# Altium PCB HU_revB.PcbDoc (part 2 of 3)
Units mm, origin at the board's own origin, x right, y up, seen from the top; angles counter-clockwise.
Board outline 180 x 140 mm, 4 copper layers (Top Layer, Mid Layer 1, Mid Layer 2, Bottom Layer), stack 1.586 mm thick; 314 components, 348 nets, 1361 pads, 16 vias.
Unrouted connection lines stored in the file: 902.
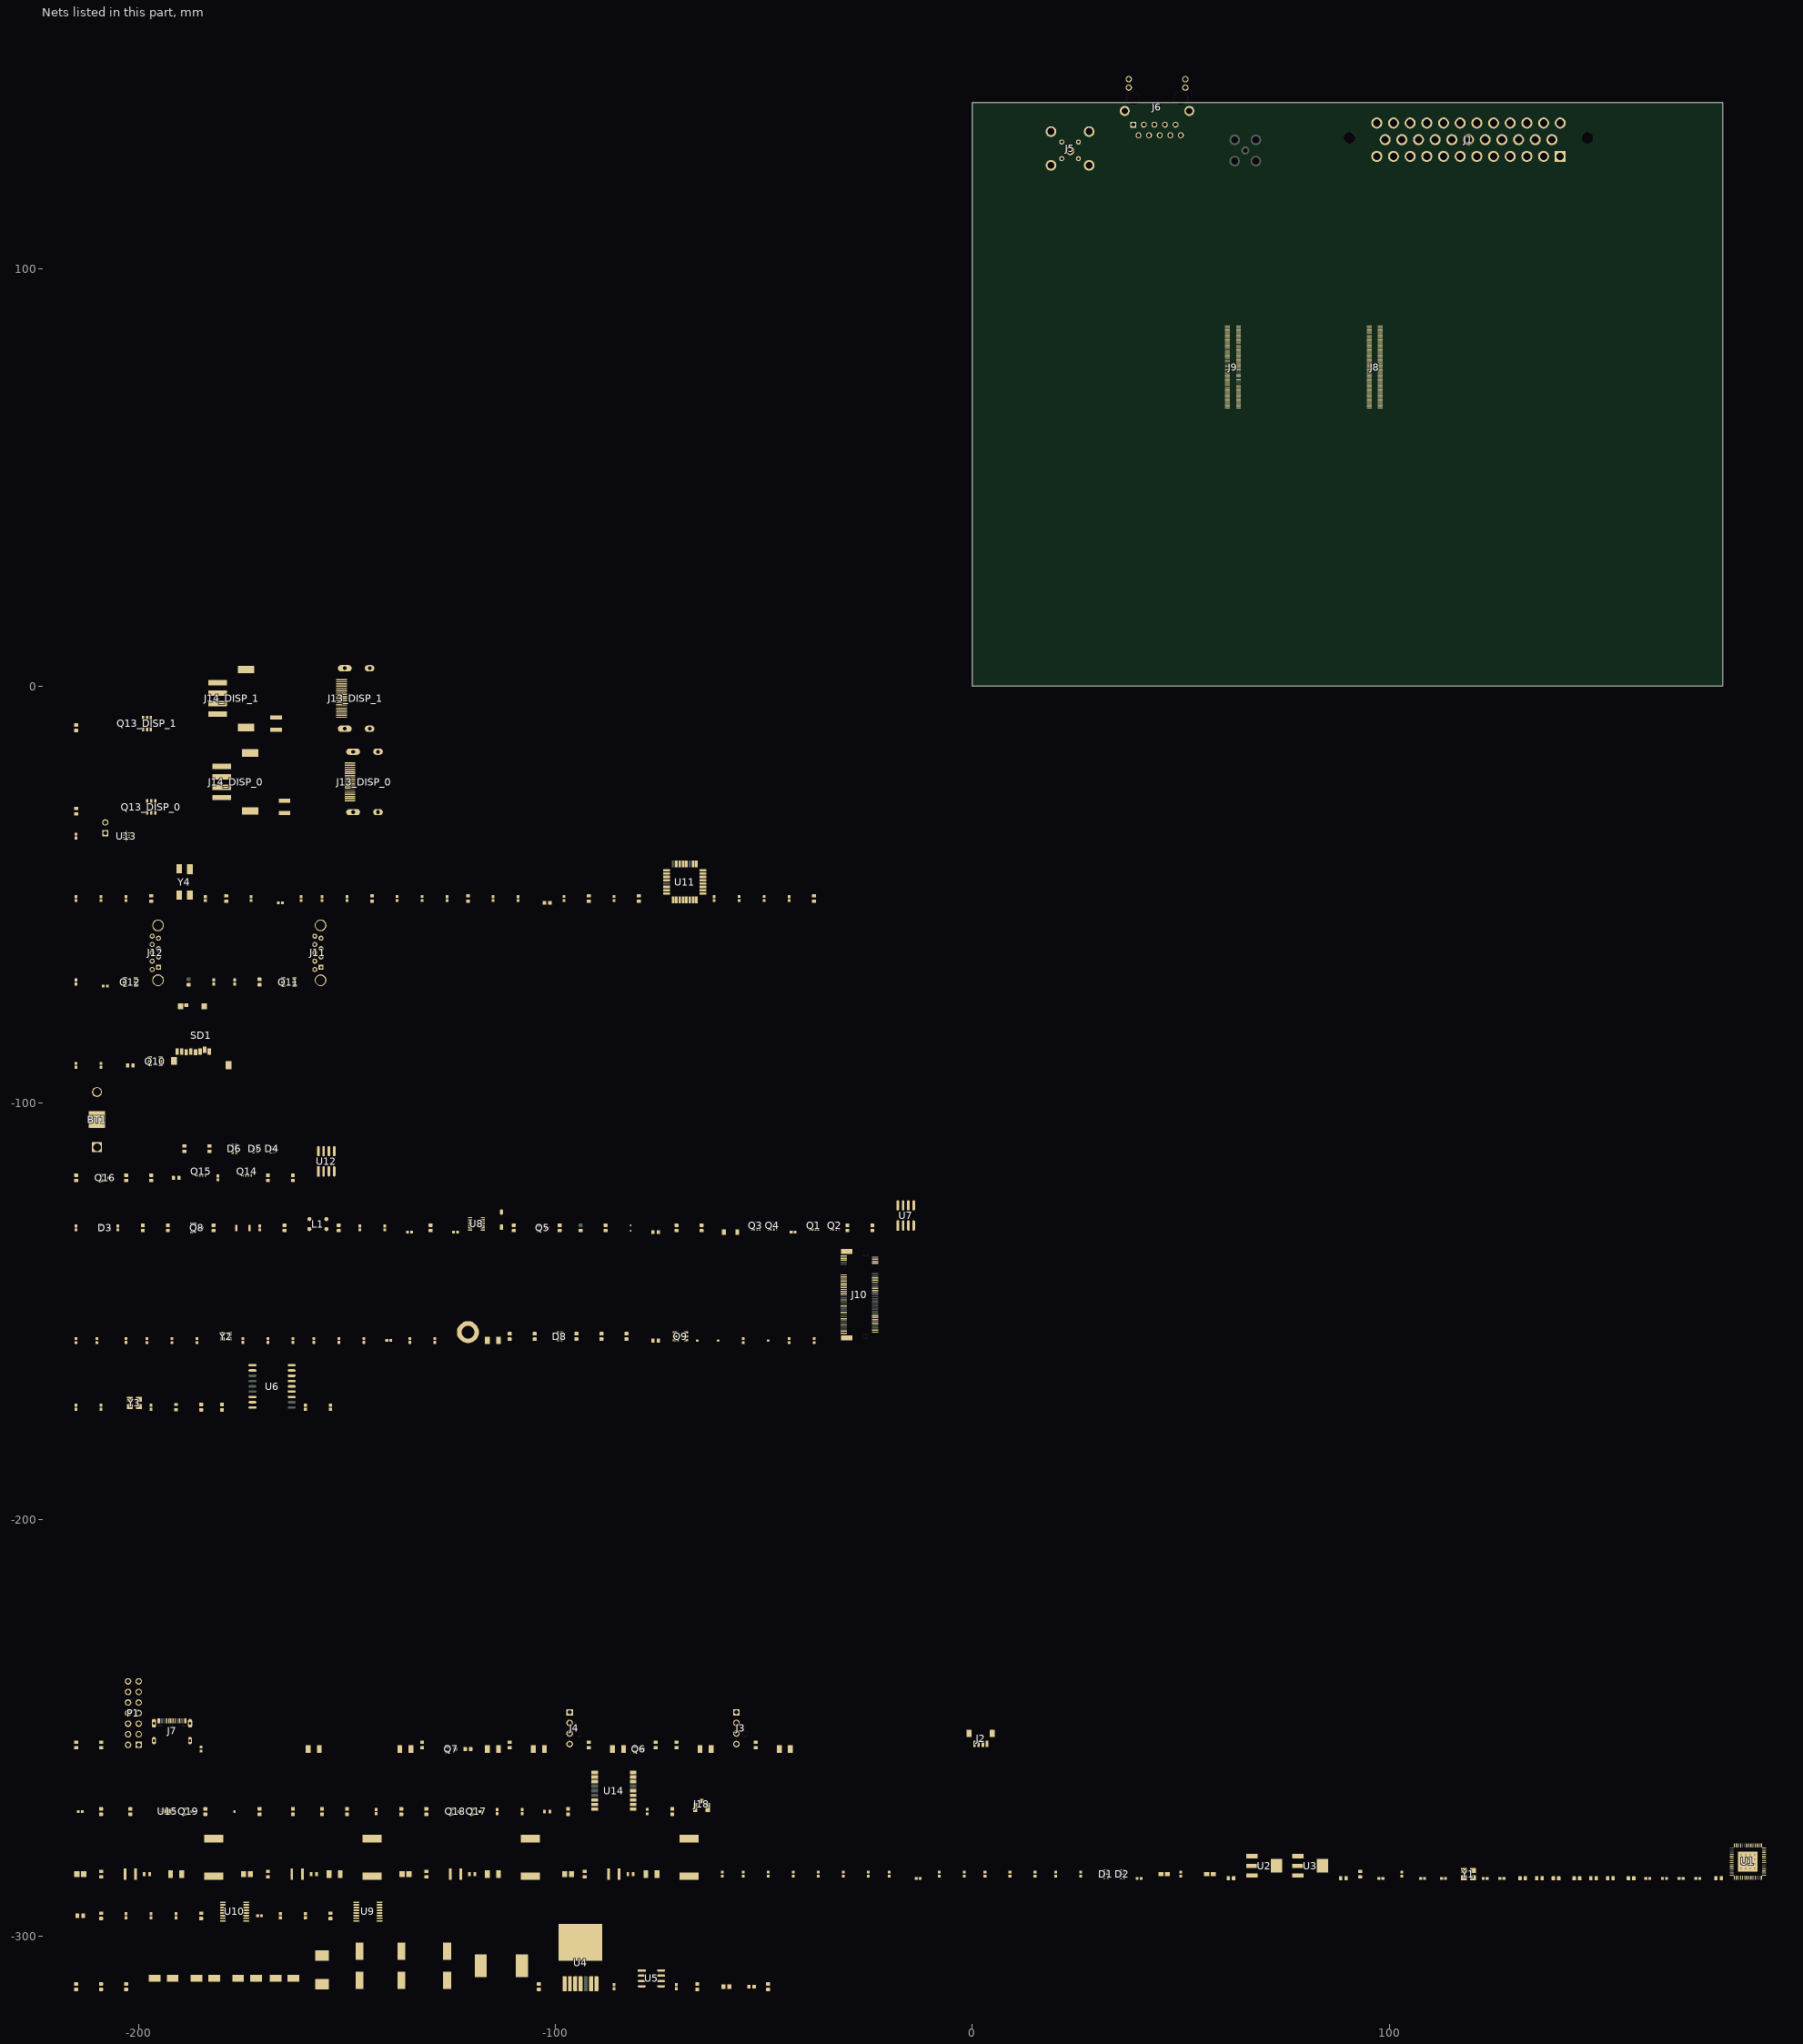
[diagram p2: the nets of this part, all layers, seen from the top]

## Part data
BT1: library part CMP-2000-05463-1, "Holder Battery Coin, 12 mm, 2-Pin THD, RoHS", Manufacturer=Keystone, Package Description="2-Pin Through Hole Device, Body 13.21 x 12.07 mm", Datasheet URL=https://datasheet.ciiva.com/3/3001-3954.pdf, Datasheet Version="Rev. H, 09/2006", Manufacturer URL=http://www.keyelco.com/, Mounting Technology=ThroughHole, Package Reference=3001
C1 C2 C3 C4 C5 C6 C7 C8 C8 C9 C9 C10 C10 C11 C11 C12 C13 C13 C14 C15 C16 C17 C17 C18 C19 C20 C21 C22 C23 C24 C25 C26 C27 C28 C29 C30 C35 C36 C37 C45 C46 C47 C48 C49 C50 C51 C52 C53 C54 C55 C56 C57 C58 C59 C60 C61 C62 C63 C64 C65 C66 C67 C68 C69 C70 C71 C72 C73 C74 C75 C76 C77 C78 C79 C80 C81 C82 C83 C84 C85 C86 C87 C88 C89 C90 C91: library part CMP-001-00058-1, "LARGE PADS, 0402 CAP, CHANGE COMMENT TO MATCH REAL P/N", Capacitor Type=Ceramic, Case/Package=0402, Max Operating Temperature=85°C, Min Operating Temperature=-55°C, Mounting Technology="Surface Mount", Pins=2, RoHS Compliant=Yes
C12 C14: library part CMP-2006-02792-2, "Chip Multilayer Ceramic Capacitors for General Purpose, 0603, 10uF, X5R, 15%, 20%, 6.3V", Capacitance=10uF, Case Code (Imperial)=0603, Case Code (Metric)=1608, Dielectric=X5R, Max Operating Temperature=85°C, Min Operating Temperature=-55°C, Package Quantity=4000, Tolerance=20%, Voltage=6.3V, Case/Package=0603, Depth=0.8mm, Height=0.8mm, Lead Free="Lead Free", Length=1.6mm, Material=Ceramic, Mount="Surface Mount", Packaging="Tape and Reel", Radiation Hardening=No, REACH SVHC="No SVHC", Termination=SMD/SMT, Thickness=0.035inch, Voltage Rating=6.3V, Voltage Rating (DC)=6.3V, Width=0.031inch
C31 C32 C33 C34: library part CMP-2007-03222-3, "Chip Multilayer Ceramic Capacitors for General Purpose, 0805, 22uF, X5R, 15%, 20%, 25V", Capacitance=22uF, Case Code (Imperial)=0805, Case Code (Metric)=2012, Dielectric=X5R, Max Operating Temperature=85°C, Min Operating Temperature=-55°C, Package Quantity=3000, Resistor Type=Ceramic, Tolerance=20%, Voltage=25V, Case/Package=0805, Depth=1.25mm, Height=1.25mm, Lead Free="Lead Free", Length=2mm, Material=Ceramic, Mount="Surface Mount", Packaging="Tape and Reel", REACH SVHC="No SVHC", Termination=SMD/SMT, Thickness=0.057inch, Voltage Rating=25V, Voltage Rating (DC)=25V, Weight=0.000335oz, Width=1.25mm
C38 C39 C40: library part CMP-05428-001387-1, "Conductive Polymer Aluminum Solid Capacitors (OS-CON) 33uF ±20% 20V RADIAL SMT 8x6.9mm", Capacitance=33uF, Case/Package=Radial, ESR (Equivalent Series Resistance)=45mR, Leakage Current=132uA, Max Operating Temperature=105°C, Min Operating Temperature=-55°C, Package Quantity=1000, Ripple Current=1.89A, Tolerance=20%, Voltage=20V, Construction=Cylindrical, Diameter=8mm, Dissipation Factor=12%, Height=6.9mm, Height - Seated (Max)=0.276inch, Length=6.9mm, Life (Hours)=2000Hour, Mount="Surface Mount", Number of Pins=7, Packaging="Tape and Reel", Polarity=Polar, REACH SVHC="No SVHC", Ripple Current (AC)=1.89A, RoHS Compliant=Yes, Series="OS-CON™, SVP", Termination=SMD/SMT, Voltage Rating=20V, Voltage Rating (DC)=20V
C41 C42 C43 C44: library part CMP-05427-000047-1, "CAP ALUM 100UF 20% 10V SMD", Capacitance=100uF, Case/Package=Radial, Max Operating Temperature=85°C, Min Operating Temperature=-40°C, Package Quantity=1, Ripple Current=50mA, Tolerance=20%, Voltage Rating=10V, Construction=Cylindrical, Contact Plating=Tin, Diameter=5mm, Height=5.4mm, Height - Seated (Max)=0.213inch, Lead Free="Lead Free", Length=5.5mm, Life (Hours)=1000Hour, Mount="Surface Mount", Packaging="Tape and Reel", Radiation Hardening=No, Ripple Current (AC)=50mA, RoHS Compliant=Yes, Series=S, Termination=SMD/SMT, Voltage Rating (DC)=10V
D1 D2 D4 D5: library part CMP-04989-000002-1, "4-CHANNEL LOW-CAPACITANCE SURGE", Ambient Temperature Range High=+125°C, Ambient Temperature Range Low=-40°C, Breakdown Voltage=5.5V, Capacitance=0.55pF, Clamping Voltage=11.5V, Manufacturer="Texas Instruments", Package=DQA0010A, Peak Pulse Current=5.5A, Peak Pulse Power=50W, Reverse Standoff Voltage=3.6V, Temperature="-40°C to +125°C", Automotive=No, Category=Diode, ComponentLink2Description=Datasheet, ComponentLink2URL=http://www.ti.com/lit/ds/symlink/esd204.pdf, Device Class L1="Circuit Protection", Device Class L2="TVS Diodes", Device Class L3=unset, Digikey Description="4-CHANNEL LOW-CAPACITANCE SURGE", Direction=Bidirectional, Height=0.55mm, Lead Free=Yes, Manufacturer Part Number=ESD204DQAR, Mouser Description="4-Channel Low-Capacitance Surge and ESD Protection Diode 10-USON -40 to 125", Number of Channels=4, Octopart=https://octopart.com/esd204dqar-texas+instruments-89917476, RoHS=TRUE, Standoff Height=0mm, Temperature Range High=+125°C, Temperature Range Low=-40°C
D1: library part CMP-1060-00565-1, "Zener Voltage Regulator, 500 mW, 2-Pin SOD-123, Pb-Free, Tape and Reel", Manufacturer="On Semiconductor", ComponentLink1Description="Manufacturer URL", ComponentLink1URL=http://www.onsemi.com/, ComponentLink2Description=Datasheet, ComponentLink2URL=http://www.onsemi.com/pub_link/Collateral/MMSZ5221BT1-D.PDF, ComponentLink3Description="Package Specification", ComponentLink3URL=http://www.onsemi.com/pub_link/Collateral/425-04.PDF, DatasheetVersion="Rev. 12", Mounting Technology="Surface Mount", P Max (W)=0.5, PackageDescription="2-Pin SOD, Body 1.6 x 2.69 mm", PackageReference=SOD-123-2-425-04, PackageVersion="Rev. G, 10/2009", Packing="Tape and Reel", PartNumber=MMSZ5242BT1G, RoHS=Pb-Free, VZ Typ (V)=12
D2: library part CMP-2000-04993-2, "DIODE GEN PURP 100V 150MA SOD123", Average Rectified Current=150mA, Capacitance=4pF, Forward Voltage=1V, Max Forward Surge Current (Ifsm)=1A, Max Operating Temperature=150°C, Max Repetitive Reverse Voltage (Vrrm)=100V, Max Reverse Leakage Current=5uA, Max Surge Current=2A, Min Operating Temperature=-65°C, Package Quantity=3000, Power Dissipation=400mW, Current Rating=150mA, Element Configuration=Single, Forward Current=150mA, Height=1.2mm, Lead Free="Lead Free", Length=2.85mm, Max Reverse Voltage (DC)=100V, Mount="Surface Mount", Number of Pins=2, Output Current=150mA, Packaging="Tape and Reel", Peak Non-Repetitive Surge Current=2A, Polarity=Standard, Radiation Hardening=No, Recovery Time=4ns, Reverse Recovery Time=4ns, Voltage Rating (DC)=100V, Width=1.8mm
D3: library part CMP-12225-000055-1, "TVS DIODE 26.5V 44V SOT323-3", Breakdown Voltage=28.5V, Capacitance=3pF, Clamping Voltage=44V, Manufacturer=STMicroelectronics, Max Junction Temp=+175°C, Package=SOT323-3L, Peak Pulse Current=3A, Peak Pulse Power=170W, Reverse Standoff Voltage=26.5V, Temperature="-55°C to +175°C", Temperature Range Low=-55°C, Automotive=Yes, Automotive Grade="Grade 0", Category=Diode, ComponentLink2Description=Datasheet, ComponentLink2URL=https://www.st.com/resource/en/datasheet/esdcan02-2bwy.pdf, Device Class L1="Circuit Protection", Device Class L2="TVS Diodes", Device Class L3=unset, Digikey Description="TVS DIODE 26.5V 44V SOT323-3", Direction=Bidirectional, Height=1.1mm, Ipc Land Pattern Name=SOT65P210X95-3, Lead Free=Yes, Manufacturer Part Number=ESDCAN02-2BWY, Mouser Description="TVS Diodes / ESD Suppressors Automotive dual-line Transil, Transient voltage suppressor (TVS) for CAN bus", Number of Channels=2, Octopart=https://octopart.com/esdcan02-2bwy-stmicroelectronics-58631133, RoHS=TRUE, Standoff Height=0mm, Temperature Range High=+175°C
D6 D8: library part CMP-004-00040-2, "Led, Red/Grn, 180Mcd/230Mcd, 624Nm/525Nm Rohs Compliant: Yes", Component Type=Standard, Design Item ID=CMP-004-00034-2, Pins=4, Source=rgled.SchLib
D7: library part CMP-2000-05097-3, "DIODE SCHOTTKY 40V 5A SMC", Capacitance=300pF, Forward Current=5A, Manufacturer="Diodes Inc.", Max Junction Temp=+150°C, Max Repetitive Reverse Voltage=40V, Max Surge Forward Current=100A, Package=SMC, Peak Reverse Current=0.5mA, Temperature="-55°C to +150°C", Temperature Range Low=-55°C, Automotive=No, Automotive Grade=NA, Category=Diode, ComponentLink2Description=Datasheet, ComponentLink2URL=https://www.diodes.com/assets/Datasheets/ds13012.pdf, Device Class L1="Discrete Semiconductors", Device Class L2=Diodes, Device Class L3="Schottky Diodes", Digikey Description="DIODE SCHOTTKY 40V 5A SMC", Footprint Url=https://www.diodes.com/assets/Package-Files/SMC.pdf, Height=2.5mm, Lead Free=Yes, Manufacturer Part Number=B540C-13-F, Mouser Description="Diode: Schottky rectifying; SMD; 40V; 5A; SMC; Package: reel, tape", Octopart=https://octopart.com/b540c-13-f-diodes+inc.-325873, Reverse Voltage=40V, RoHS=TRUE, Standoff Height=0.1mm, Temperature Range High=+150°C
D45: library part CMP-1060-00750-1, "Zener Voltage Regulator, 500 mW, 2-Pin SOD-523, Pb-Free, Tape and Reel", Manufacturer="On Semiconductor", PartNumber=MM5Z3V3T1G, ComponentLink1Description="Manufacturer URL", ComponentLink1URL=http://www.onsemi.com/, ComponentLink2Description=Datasheet, ComponentLink2URL=http://www.onsemi.cn/pub_link/Collateral/MM5Z2V4T1-D.PDF, ComponentLink3Description="Package Specification", ComponentLink3URL=http://www.onsemi.com/pub_link/Collateral/502-01.PDF, DatasheetVersion="Rev. 10", Mounting Technology="Surface Mount", P Max (W)=0.5, PackageDescription="2-Pin SOD, Body 1.2 x 0.8 mm", PackageReference=SOD-523-2-502-01, PackageVersion="Rev. E, 09/2010", Packing="Tape and Reel", RoHS=Pb-Free, VZ Typ (V)=3.3
F1 F2 F3 F4 F5 F6 F7 F8 F10 F11 F12 F13: library part CMP-16042-000006-1, "FUSE BOARD MNT 5A 63VAC/VDC 1206", RoHS Compliant=Yes
F9_DISP_0 F9_DISP_1: library part CMP-005-00028-2, "PTC Thermistor", RoHS Compliant=Yes
J1: library part CMP-03369-000154-1, "CONN HEADER R/A 35POS 4MM", Color=Black, Current Rating=17A, Flammability Rating="UL94 V-0", Max Operating Temperature=221°C, Max Voltage Rating (AC)=250V, Min Operating Temperature=-40°C, Package Quantity=1, Circuit Application=Power, Connector System=Wire-to-Device, Connector Type="Male Pin", Contact Material=Brass, Contact Plating=Tin, Contact Type="Male Pin", Depth=37.9mm, ELV=Compliant, Fastening Type=Ramp, Gender=Male, Height=32.1mm, Housing Material=Thermoplastic, Insulation=Insulated, Lead Free="Lead Free", Length=3.03inch, Mount="Through Hole", Number of Contacts=35, Number of Positions=35, Number of Rows=3, Number of Signal Positions=35, Orientation="Right Angle", Packaging=Bulk, PCB Mount Alignment="Yes (With)", PCB Mount Retention=With, PCB Thickness=0.062inch, Pitch=0.157inch, Primary Type=Rectangular, Radiation Hardening=No, RoHS Compliant=Yes, Row Spacing=0.157inch, Sealable="Yes (With)", Series=Ampseal, Shielding=Unshielded, Tab Thickness=1.3mm, Termination=Solder, Width=37.9mm
J2: library part CMP-17439-000370-1, "CONN HEADER SMD 4POS 1MM", Color=Natural, Flammability Rating="UL94 V-0", Package Quantity=1, Voltage Rating=50V, Connector Type=Header, Contact Finish - Mating=TIN, Contact Material="Copper Alloy", Contact Plating=Tin, Contact Shape=Square, Contact Type="Male Pin", Fastening Type=Pull, Insulation Color=Natural, Insulation Material=Nylon, Lead Free="Lead Free", Mated Stacking Heights=4.9mm, Mount="Surface Mount", Number of Positions=4, Number of Rows=1, Packaging="Cut Tape", Pitch=0.039inch, Series=SR, Termination=Solder
J3 J4: library part CMP-04776-000290-2, "CONN HEADER VERT 4POS 2.54MM", Ambient Temperature Range High=105°C, Current Rating=500mA, Housing Color=Beige, Manufacturer Lifecycle Status=ACTIVE, Max Operating Temperature=75°C, Min Operating Temperature=0°C, Voltage Rating=250V, Contact Material="Brass, Copper", Contact Plating=Tin, Country of Origin=HK, Depth=5.84mm, Gender=Male, Glow Wire Compliant=Non-compliant, Halogen Free="Low Halogen", Height=7.7mm, Housing Material=Nylon, Lead Pitch=2.54mm, Length=10.2mm, Lifecycle Status=Production, Mount="Through Hole", NexarPartId=854935, Number of Circuits=4, Number of Contacts=4, Number of Pins=4, Number of Positions=4, Number of Rows=1, Orientation=Vertical, Packaging=Bulk, Pitch=2.54mm, Plating=Copper, Radiation Hardening=No, REACH SVHC=Unknown, RoHS=Compliant, Schedule B="8536694040, 8536694040", Termination="Through Hole", Voltage Rating (DC)=250V
J5: library part CMP-002-00044-4, "Connector RF Mini-FAKRA Plug 9GHz 50Ohm Solder Right Angle Through Hole", Component Type=Standard, Design Item ID=CMP-002-00085-1, Pins=9, Source=fakra4ch.SchLib
J6: library part CMP-002-00090-1, "Connector RJ45 Receptacle 8 Position Solder Straight Through Hole 1 Port Tray", Max Operating Temperature=70°C, Min Operating Temperature=0°C, Pins=8
J7: library part CMP-002-00091-1, "USB Connector, USB Type C, USB 2.0, Receptacle, 24 Ways, Surface Mount, Through Hole Mount", Pins=24
J8 J9: library part CMP-002-00088-1, "Mezzanine Connector, Receptacle, 0.4 mm, 2 Rows, 100 Contacts, Surface Mount Straight"
J10: library part CMP-03365-000001-1, "CONN EDGE DUAL FMALE 67POS 0.020", Current Rating=0.5A, Manufacturer=TE, Temperature="-40°C to +80°C", Temperature Range High=+80°C, Temperature Range Low=-40°C, Voltage Rating=50V, Automotive=No, Category=Conn, ComponentLink2Description=Datasheet, ComponentLink2URL=http://www.te.com/commerce/DocumentDelivery/DDEController?Action=showdoc&DocId=Specification+Or+Standard%7F114-115006%7FB%7Fpdf%7FEnglish%7FENG_SS_114-115006_B_114-115006_REV_B.pdf%7F1-2199230-6, Conn Gender=Female, Conn Orientation="Right Angle", Contact Material=Gold,Tin, Device Class L1=Connectors, Device Class L2="Card Edge Connectors", Device Class L3=unset, Digikey Description="CONN EDGE DUAL FMALE 67POS 0.020", Footprint Url=http://www.te.com/commerce/DocumentDelivery/DDEController?Action=showdoc&DocId=Customer+Drawing%7F2199230%7FB2%7Fpdf%7FEnglish%7FENG_CD_2199230_B2.pdf%7F1-2199230-6, Height=4.2mm, Is Female=yes, Lead Free=Yes, Manufacturer Part Number=1-2199230-6, Number of Contacts=67, Number of Rows=2, Octopart=https://octopart.com/1-2199230-6-te+connectivity-34969376, Package=1-2199230-6, Pitch=0.5mm, RoHS=TRUE
J11 J12: library part CMP-0411-00003-1, "Universal Serial Bus (USB 3.0) I/O Connector, Vertical, Type A, Through Hole, 9 Circuits, -20 to 85 degC, RoHS, Tray", Temperature Max="85 degC", Temperature Min="-20 degC", ComponentLink1Description="Manufacturer URL", ComponentLink1URL=http://www.molex.com/, ComponentLink2Description=Datasheet, ComponentLink2URL=http://www.molex.com/webdocs/datasheets/pdf/en-us/0484080003_IO_CONNECTORS.pdf, ComponentLink3Description="Package Specification", ComponentLink3URL=http://www.molex.com/pdm_docs/sd/484080003_sd.pdf, Mounting Technology="Through Hole", No. of Positions=9, No. of Rows=2, Orientation=Vertical, PackageDescription="9-Pin USB 3.0 I/O Receptacle, Vertical, Height 15.25 mm, Through Hole", PackageVersion="Rev. F, 12/2012", Packing=Tray, PartNumber=48408-0003, RoHS=TRUE
J13_DISP_0 J13_DISP_1: library part CMP-002-00089-3, "HDMI CONNECTOR, RCPT, 19POS, SMT; Available until stocks are exhausted Alternative available", Max Operating Temperature=85°C, Min Operating Temperature=-20°C, Gender=Female, Pins=19
J14_DISP_0 J14_DISP_1: library part CMP-17439-000072-1, "CONN HEADER SMD R/A 4POS 2.5MM", Color=Natural, Contact Resistance=20mR, Housing Color=Beige, Max Current Rating=3A, Max Operating Temperature=85°C, Max Voltage Rating (AC)=250V, Min Operating Temperature=-25°C, Package Quantity=1, Connector Type="Male Pin", Contact Material="Copper Alloy", Contact Plating=Tin, Contact Type="Male Pin", Depth=10mm, Gender=Male, Housing Material=Polyamide, Lead Free="Lead Free", Length=15mm, Mount="Surface Mount", Number of Contacts=4, Number of Positions=4, Number of Rows=1, Orientation="Right Angle", Packaging="Tape and Reel", Pitch=0.098inch, REACH SVHC="No SVHC", Series=XH, Termination=Solder
J15: library part CMP-02766-001053-1, "CONN HEADER VERT 2POS 2.54MM", Housing Color=Black, Max Current Rating=3A, Max Operating Temperature=125°C, Min Operating Temperature=-55°C, Contact Material=Bronze, Contact Plating=Gold, Depth=2.48mm, Gender=Male, Housing Material=Polymer, Length=5.08mm, Number of Contacts=2, Number of Rows=1, Orientation=Straight, Packaging=Bulk, Pitch=2.54mm, Radiation Hardening=No, Termination=Solder
J17: library part CMP-002-00054-1, "RF F Connector, Male, Board Mount, Solder Terminal, Plug", Connector Type="RF F CONNECTOR", Mounting Technology=Board, RoHS Compliant=Yes
J18: library part CMP-0029-00003-2, "CONN U.FL RCPT STR 50 OHM SMD", Case/Package=SMD/SMT, Dielectric Material=Polymer, Frequency=6GHz, Housing Color=Beige, Max Operating Temperature=90°C, Min Operating Temperature=-40°C, Package Quantity=1, Body Material=Bronze, Body Plating=Silver, Connector Type=Coaxial, Contact Material=Brass, Contact Plating=Gold, Depth=3.1mm, Fastening Type=Snap, Impedance=50R, Lead Free="Lead Free", Length=3mm, Max Frequency=6GHz, Mount="Surface Mount", Orientation=Vertical, Packaging="Tape and Reel", Plating=Silver, Radiation Hardening=No, Termination=Solder
L1 L4 L7 L10: library part CMP-0227-00094-3, Ambient Temperature Range High=95°C, Ambient Temperature Range Low=-40°C, Case/Package=Nonstandard, Current Rating=1.2A, DC Resistance (DCR)=255mΩ, Inductance=100µH, Inductance Tolerance=30%, Max Operating Temperature=125°C, Self Resonant Frequency=6MHz, Test Frequency=100kHz, Composition=Wirewound, Core Material=Ferrite, Depth=10mm, Height=3.8mm, Height - Seated (Max)=4.0894mm, Length=10mm, Max DC Current=1.2A, Min Operating Temperature=-40°C, Mount="Surface Mount", NexarPartId=8917123, Number of Pins=2, Packaging="Cut Tape (CT)", REACH SVHC=Unknown, Resistance=255mΩ, RMS Current (Irms)=1.2A, RoHS=Compliant, Saturation Current=1.2A, Shielding=Shielded, Termination=SMD/SMT, Tolerance=30%, Weight=1.273007g, Width=10mm
L1: library part CMP-07251-000006-1, "CMC 51UH 200MA 2LN 2KOHM SMD", Case/Package=4532, Current=200mA, DC Resistance (DCR)=3.5R, Inductance=51uH, Insulation Resistance=10MR, Max Operating Temperature=125°C, Min Operating Temperature=-40°C, Package Quantity=1, Resistance=2kR, Self Resonant Frequency=100kHz, Tolerance=50%, Voltage Rating (DC)=50V, Contact Plating=Tin, Core Material=Ferrite, Current Rating=200mA, DC Current=200mA, Depth=3.4mm, Element Configuration=Dual, Height=0.118inch, Impedance=2kR, Lead Free="Lead Free", Length=4.5mm, Material=Steel, Max DC Current=200mA, Mount="Surface Mount", Number of Lines=2, Packaging="Tape and Reel", REACH SVHC="No SVHC", RoHS Compliant=Yes, Series=SRF4532, Termination=SMD/SMT, Test Frequency=100kHz, Width=0.126inch
L2 L5 L8 L11: library part CMP-11268-000041-1, "NOT COILCRAFT - ACTUAL P# --> ADL32VHC-220M /  - Power Injection Chokes for PoC", Ambient Temperature Range High=+125°C, Ambient Temperature Range Low=-40°C, Inductance=22uH, Manufacturer=coilcraft, Manufacturer Part Number=1210POC-223MRC, Package=1210POC, Rms Current=700mA, Saturation Current=720mA, Self Resonant Frequency=70MHz, Series Resistance=0.88Ω, Test Frequency=100kHz, Tolerance=20%, Automotive=Yes, Automotive Grade="Grade 1", Category=Ind, ComponentLink2Description=Datasheet, ComponentLink2URL=https://drive.google.com/open?id=15FlOq8Y4YbRFohfA_cJ40jgnqs8va2Mh, Core Material=Ferrite, Device Class L1="Passive Components", Device Class L2=Inductors, Device Class L3="Fixed Inductors", Height=3mm, Lead Free=Yes, Octopart=https://octopart.com/1210poc-223mrc-coilcraft-103207315, RoHS=TRUE
L3 L6 L9 L12: library part CMP-11268-000007-1, "Fixed Inductors PFL1609 Low Profile 0.56 uH 20 % 1.4 A", Ambient Temperature Range High=+105°C, Ambient Temperature Range Low=-40°C, Inductance=0.56uH, Manufacturer=coilcraft, Package=PFL1609, Rms Current=1100mA, Saturation Current=710mA, Self Resonant Frequency=600MHz, Series Resistance=130mΩ, Test Frequency=7.9MHz, Tolerance=20%, Automotive=Yes, Automotive Grade="Grade 1", Category=Ind, ComponentLink2Description=Datasheet, ComponentLink2URL=https://www.coilcraft.com/pdfs/pfl1609.pdf, Composition=Wirewound, Core Material=Composite, Device Class L1="Passive Components", Device Class L2=Inductors, Device Class L3="Fixed Inductors", Height=0.95mm, Lead Free=Yes, Manufacturer Part Number=PFL1609-561MEW, Mouser Description="Fixed Inductors PFL1609 Low Profile 0.56 uH 20 % 1.4 A", Octopart=https://octopart.com/pfl1609-561mew-coilcraft-20329171, RoHS=TRUE, Shielding=true
L13: library part CMP-0227-00708-1, "SMD-Shielded Power Inductor WE-PD, L = 10.0 µH", Inductance="10.0 ÂµH", ComponentLink1Description="Manufacturer Link", ComponentLink1URL=http://www.we-online.com, ComponentLink2Description=Datasheet, ComponentLink2URL=http://www.we-online.de/katalog/media/pdf/74477110.pdf, DatasheetVersion="ver 7, Sep-2006", PackageDescription="SMD Inductor, 2-Leads, Body 12.0 x 12.0 mm", PackageReference=WE-PD-L, PackageVersion=2006
L14: library part CMP-06042-013840-1, "Wire Wound RF Inductor 27nH ±5% 440mA 0.21Ω 0603 (1608)", Case Code (Imperial)=0603, Case Code (Metric)=1608, Current Rating=440mA, DC Resistance (DCR)=210mR, Inductance=27nH, Max Operating Temperature=125°C, Min Operating Temperature=-55°C, Package Quantity=4000, Resistor Type=Wirewound, Self Resonant Frequency=3.7GHz, Test Frequency=100MHz, Tolerance=5%, Case/Package=0603, Core Material=Non-Magnetic, DC Current=440mA, Depth=1mm, Height=0.8mm, Height - Seated (Max)=0.039inch, Lead Free="Lead Free", Length=1.6mm, Max DC Current=440mA, Military Standard=Not, Mount="Surface Mount", Packaging="Tape and Reel", Q Factor=40, Radiation Hardening=No, Shielding=Unshielded, Termination=SMD/SMT, Weight=0.000106oz, Width=0.8mm
MP1: library part CMP-03913-59774857-1, "9774025243R Spacer Material: Steel, Tin-Plated Mounting: SMT Series: WA-SMST Thread D: M2", Max Operating Temperature=150°C, Min Operating Temperature=-55°C, Height=2.5mm, Length=2.5mm, Material=Steel, NexarPartId=59774857, Outside Diameter=4.3434mm, Packaging="Tape and Reel", Plating=Tin, REACH SVHC=Unknown, RoHS=Compliant, Threaded/Unthreaded=Threaded
P1: library part CMP-1024-00130-1, "Modified .025\" SQ Post Header, Through-hole, Vertical, -55 to 125 degC, 2.54 mm Pitch, 14-Pin, Male, RoHS", Manufacturer=Samtec, Temperature Range="-55 to 125 degC", ComponentLink1Description="Manufacturer URL", ComponentLink1URL=http://www.samtec.com, ComponentLink2Description=Datasheet, ComponentLink2URL=http://www.samtec.com/documents/webfiles/pdf/MTSW.PDF, ComponentLink3Description="Package Specification", ComponentLink3URL=http://www.samtec.com/documents/webfiles/cpdf/MTSW-XXX-XX-X-X-XXXX-XX-XXX-MKT1.pdf, DatasheetVersion=F-214, Mounting Technology=Through-hole, Orientation=Vertical, PackageDescription="Assembly .025\" [.64] SQ Post Terminal Strip", PackageReference=MTSW-107-07-X-D-170, PackageVersion="BI, 2/1987", PartNumber=MTSW-107-07-G-D-170, Pitch="2.54 mm", RoHS=True
Q1 Q2 Q3 Q4 Q14 Q15: library part CMP-013-00018-2, "Trans MOSFET P-CH 20V 22.1A 8-Pin PowerPAK 1212 EP T/R", Component Type=Standard, Design Item ID=CMP-013-00036-4, Pins=5, Source=SISH615ADN-T1-GE3.SchLib
Q5 Q6 Q7 Q16 Q18: library part CMP-2000-05968-1, "N-Channel Enhancement Mode Mosfet, 50 V, 200 mA, -55 to 150 degC, 6-Pin SOT-323, RoHS, Tape and Reel", Id - Continuous Drain Current=200mA, Manufacturer=DiodesIncorporated, Maximum Operating Temperature=+150C, Minimum Operating Temperature=-55C, Package / Case=SOT-323-3, Package Description="3-Pin Small Outline Transistor, Body 2 x 1.25 mm, Pitch 0.65 mm", Package Reference=SOT323, Pd - Power Dissipation=200mW, Rds On - Drain-Source Resistance=1.4Ohms, Vds - Drain-Source Breakdown Voltage=75V, Vgs - Gate-Source Voltage=20V, Brand=DiodesIncorporated, Channel Mode=Enhancement, Configuration=Single, Datasheet URL=http://www.diodes.com/_files/datasheets/ds30206.pdf, Datasheet Version="Rev. 11-2, 09/2013", Factory Pack Quantity=3000, Forward Transconductance - Min=0.1S, Height=1mm, Length=2.2mm, Manufacturer URL=http://www.diodes.com/, Mounting Style=SMD/SMT, Mounting Technology=SurfaceMount, Number of Channels=1Channel, Packaging=Reel, Product=MOSFETSmallSignal, Product Category=MOSFET, RoHS=True, Series=BSS138, Technology=Si, Transistor Polarity=N-Channel, Transistor Type=1N-Channel, Type=EnhancementModeFieldEffectTransistor, Typical Turn-Off Delay Time=20ns, Typical Turn-On Delay Time=20ns, Unit Weight=0.000212oz, Width=1.35mm
Q8: library part CMP-07173-000101-1, "MOSFET N-CH 50V 220MA SOT-23", Case/Package=SOT-23, Continuous Drain Current (ID)=220mA, Drain to Source Breakdown Voltage=50V, Drain to Source Resistance=3.5R, Gate to Source Voltage (Vgs)=20V, Input Capacitance=27pF, Max Operating Temperature=150°C, Max Power Dissipation=360mW, Min Operating Temperature=-55°C, On-State Resistance=6R, Package Quantity=1, Threshold Voltage=1.3V, Contact Plating=Tin, Current Rating=220mA, Drain to Source Voltage (Vdss)=50V, Dual Supply Voltage=50V, Element Configuration=Single, Fall Time=9ns, Height=0.93mm, Lead Free="Lead Free", Length=2.92mm, Mount="Surface Mount", Nominal Vgs=1.3V, Number of Elements=1, Number of Pins=3, Packaging="Tape and Reel", Power Dissipation=360mW, Radiation Hardening=No, Rds On Max=3.5R, REACH SVHC="No SVHC", Rise Time=9ns, Termination=SMD/SMT, Turn-Off Delay Time=20ns, Turn-On Delay Time=2.5ns, Voltage Rating (DC)=50V, Weight=0.03g, Width=1.3mm
Q9 Q10 Q11 Q12 Q13_DISP_0 Q13_DISP_1: library part CMP-019-00054-1, "Power Switch ICs – Power Distribution; VISHAY; SIP32510DT-T1-GE3; 1; 1; 5.5 V; SOT-23-6", Case/Package=SOT-23-6, Max Operating Temperature=85°C, Max Power Dissipation=833mW, Max Supply Voltage=5.5V, Min Operating Temperature=-40°C, Min Supply Voltage=1.2V, Mounting Technology="Surface Mount"
Q17 Q19: library part CMP-2000-06170-1, "P-Channel Enhancement Mode MOSFET, 310 mW, 20 V, -55 to 150 degC, 3-Pin SOT-323, RoHS, Tape and Reel", Drain-Source On Resistance-Max=750mO, Drain-to-Source Voltage [Vdss]=20V, Manufacturer="Diodes Inc", Package Description="3-Pin Small Outline Transistor, Body 2 x 1.25 mm, Pitch 0.65 mm", Package Reference=SOT323, Rated Power Dissipation=310mW, Channel Type=P-Channel, Datasheet URL=http://www.diodes.com/_files/datasheets/ds31861.pdf, Datasheet Version="Rev. 3-2, 09/2013", Manufacturer URL=http://www.diodes.com/, Mounting Technology=SurfaceMount, Qg Gate Charge=0.622nC
R1 R2 R3 R4 R5 R6 R7 R8 R9 R10 R11 R12 R13 R14 R15 R16 R17 R18 R19 R20 R21 R22 R23 R24 R25 R26 R27 R28 R29 R30 R31 R32 R33 R34 R35 R36 R37 R38 R39 R40 R41 R42 R44 R45 R46 R47 R51 R52 R53 R54 R55 R56 R62 R63 R64 R66 R67 R68 R69 R71 R72 R73 R74_DISP_0 R74_DISP_1 R75 R78 R80 R81 R83 R86 R87 R88 R89 R90 R91 R92 R93 R94 R95 R97 R98 R99 R100 R101 R102 R103 R104 R105 R106: library part CMP-009-00002-14, "Resistor"
R43 R70: library part CMP-2000-00869-1, Manufacturer=Panasonic, Part Number=ERT-J1VR103J
R48 R49 R50 R57 R58 R59 R60 R61 R76 R77 R79 R82 R84 R85 R96: library part CMP-009-00118-2, "READ THE NAME", Component Type=Standard, Design Item ID=CMP-009-00206-2, Pins=2, Source=0402jump.SchLib
R65: library part CMP-1012-00623-3, "Chip Resistor, 10 KOhm, +/- 1%, 0.1 W, -55 to 155 degC, 0603 (1608 Metric), RoHS, Tape and Reel", Case Code (Imperial)=0603, Case Code (Metric)=1608, Manufacturer=Panasonic, Max Operating Temperature=155degC, Max Power Dissipation=100mW, Min Operating Temperature=-55degC, Package Description="2-Pin Surface Mount Device, Body 1.6 x 0.85 mm", Package Quantity=1, Package Reference=603, Resistance=10KOhm, Temperature Coefficient=100ppm\/degreesC, Tolerance=1%, Voltage Rating=75V, Case\/Package=0603, Composition=ThickFilm, Contact Plating=Tin, Datasheet URL=https://industrial.panasonic.com/cdbs/www-data/pdf/RDA0000/AOA0000C304.pdf, Datasheet Version=02/2017, Depth=0.8mm, Height=0.45mm, Lead Free=LeadFree, Length=1.6mm, Manufacturer URL=http://www.panasonic.com/, Military Standard=Not, Mount=SurfaceMount, Mounting Technology=SurfaceMount, Number of Pins=2, Number of Terminations=2, Packaging=TapeandReel, Power Rating=100mW, Radiation Hardening=No, REACH SVHC=NoSVHC, RoHSCompliant=true, Termination=SMD/SMT, Voltage Rating (DC)=75V, Width=0.031inch
SD1: library part CMP-2000-05848-1, "MicroSD(TM), Pitch 1.1 mm, 8 Position, Height 1.88 mm, -20 to 85 degC, RoHS, Tape and Reel", Manufacturer=Molex, Package Description="MicroSD(TM), Pitch 1.1 mm, 8 Position, Height 1.88 mm", Datasheet URL=http://www.molex.com/pdm_docs/sd/473521001_sd.pdf, Datasheet Version="Rev. G, 01/2012", Manufacturer URL=http://www.molex.com/, Mounting Technology=SurfaceMount, Package Reference=473521001
SW1: library part CMP-10040-000029-1, "SWITCH TACTILE SPST-NO 0.02A 15V", Current Rating=5A, Flammability Rating="UL94 V-0", Insulation Color=Black, Max Operating Temperature=85°C, Min Operating Temperature=-40°C, Operating Force=240gf, Actuator Type=Standard, Connector Type=USB, Contact Plating=Gold, Gender=Receptacle, Illumination Type=Non-Illuminated, Mechanical Life=500000Cycles, Mount="Surface Mount", Number of Contacts=24, Number of Ports=1, Packaging="Tape and Reel", Switch Function=Off-Mom, Switch Travel=0.13mm, Termination=Solder, Throw Configuration=SPST
TP1 TP2 TP3 TP4: library part CMP-00025-2, "Test Point .6mm"
U1: library part CMP-015-00011-2, "Quad Tunneling GMSL2/1 to CSI-2 Deserializer"
U2: library part CMP-0244-00308-1, "Fixed Low Drop Positive Voltage Regulator, 1.8V, 4-Pin SOT-223, Tape and Reel", ComponentLink1Description="Manufacturer URL", ComponentLink1URL=http://www.st.com, ComponentLink2Description=Datasheet, ComponentLink2URL=http://www.st.com/internet/com/TECHNICAL_RESOURCES/TECHNICAL_LITERATURE/DATASHEET/CD00000544.pdf, DatasheetVersion=1/11/2011, PackageDescription="4-Pin SOT-223 Package, 6.5 x 3.5 mm Body, 2.3 mm Pitch, 7 mm Lead Span", PackageReference=SOT-223, PackageVersion=2010
U3: library part CMP-0244-00318-1, "Fixed Low Drop Positive Voltage Regulator, 1.2V, 4-Pin SOT-223, Tape and Reel", ComponentLink1Description="Manufacturer URL", ComponentLink1URL=http://www.st.com, ComponentLink2Description=Datasheet, ComponentLink2URL=http://www.st.com/internet/com/TECHNICAL_RESOURCES/TECHNICAL_LITERATURE/DATASHEET/CD00000544.pdf, DatasheetVersion=1/11/2011, PackageDescription="4-Pin SOT-223 Package, 6.5 x 3.5 mm Body, 2.3 mm Pitch, 7 mm Lead Span", PackageReference=SOT-223, PackageVersion=2010
U4: library part CMP-0069-00190-3, "SIMPLE SWITCHER® High Efficiency 5A Step-Down Voltage Regulator, 7-pin TO-263", Manufacturer="Texas Instruments", PackageTopMarking=NSUZXYTTE#*LM2678*S-5.0, PowerWise=N, Code_JEDEC=MO-169-AC, ComponentLink1Description="Datasheet URL", ComponentLink1URL=http://www.ti.com/general/docs/lit/getliterature.tsp?genericPartNumber=LM2678&fileType=pdf, CompType=Switcher, PackageDescription="TO-263, Molded, .400 x .390 x .180in Body, 7 Lead, .050in Pitch, Surface Mount", PackageReference=KTW0007B, PinCount=7, RoHS=N
U5: library part CMP-1557-00012-2, "SENSOR CURRENT HALL 12.5A AC/DC", Case/Package=SOIC, Current Sensing=12.5A, Frequency=100kHz, Max Operating Temperature=125°C, Max Supply Current=5.5mA, Max Supply Voltage=5.5V, Min Operating Temperature=-40°C, Min Supply Voltage=3V, Operating Supply Voltage=3.3V, Package Quantity=1, Quiescent Current=4mA, -3db Bandwidth=100kHz, Accuracy=5%, Bandwidth=100kHz, Height=1.5mm, Length=4.9mm, Linearity=1%, Number of Channels=1, Number of Pins=8, Packaging="Tape and Reel", Polarity=Bidirectional, REACH SVHC="No SVHC", Response Time=4.6us, RoHS Compliant=Yes, Sensitivity=110mV/A, Series=-, Width=3.9mm
U6: library part CMP-0186-00133-3, "IC CAN CONTROLLER W/SPI 18SOIC", Ambient Temperature Range High=+125°C, Ambient Temperature Range Low=-65°C, Manufacturer=Microchip, Max Supply Voltage=5.5V, Min Supply Voltage=2.7V, Nominal Supply Current=10mA, Package=C04-051, Temperature="-40°C to +85°C", Temperature Range High=+85°C, Temperature Range Low=-40°C, Automotive=No, Category=IC, ComponentLink2Description=Datasheet, ComponentLink2URL=http://ww1.microchip.com/downloads/en/DeviceDoc/MCP2515-Stand-Alone-CAN-Controller-with-SPI-20001801J.pdf, Device Class L1="Integrated Circuits (ICs)", Device Class L2="Interface ICs", Device Class L3=Controllers, Digikey Description="IC CAN CONTROLLER W/SPI 18SOIC", Footprint Url=http://ww1.microchip.com/downloads/en/DeviceDoc/18L_SOIC_Wide_7.50_SO_C04-0051D.pdf, Function=Controller, Height=2.65mm, Interface=SPI,CAN, Ipc Land Pattern Name=SOIC127P1030X265-18, Lead Free=Yes, Manufacturer Part Number=MCP2515-I/SO, Mouser Description="CAN Interface IC W/ SPI Interface", Octopart=https://octopart.com/mcp2515-i%2Fso-microchip-430187, RoHS=TRUE, Standoff Height=0.1mm
U7 U12: library part CMP-1557-00015-2, "SENSOR CURRENT HALL 25A AC/DC", Case/Package=SOIC, Current Sensing=25A, Frequency=100kHz, Max Operating Temperature=125°C, Max Supply Current=5.5mA, Max Supply Voltage=5.5V, Min Operating Temperature=-40°C, Min Supply Voltage=3V, Operating Supply Voltage=3.3V, Package Quantity=1, Quiescent Current=4mA, -3db Bandwidth=100kHz, Accuracy=4%, Bandwidth=100kHz, Height=1.5mm, Length=4.9mm, Linearity=1%, Number of Channels=1, Number of Pins=8, Packaging="Tape and Reel", Polarity=Bidirectional, REACH SVHC="No SVHC", Response Time=4.6us, RoHS Compliant=Yes, Sensitivity=55mV/A, Series=-, Width=3.9mm
U8: library part CMP-318-000000-2, "Automotive CAN FD transceiver with watchdog, bus diagnostics and partial networking via sele 14-SOT-23-THIN -40 to 150", Component Type=Standard, Design Item ID=CMP-015-00012-2, Pin Count=14, Source=TCAN1146DYYRQ1.SchLib
U9 U10: library part CMP-0054-00372-2, "8-Channel, 50 kSPS to 200 kSPS, 8-Bit A/D Converter, 16-pin TSSOP, Pb-Free", Manufacturer="National Semiconductor", PackageTopMarking=NSUZXYTT*88S022*CIMT, PowerWise=Y, Code_JEDEC=MO-153-AB, ComponentLink1Description="ADC088S022 Datasheet", ComponentLink1URL=http://www.national.com/ds/AD/ADC088S022.pdf, ComponentLink2Description="ADC088S022 Web Page", ComponentLink2URL=http://www.national.com/pf/AD/ADC088S022.html, ComponentLink3Description="MTC16 Package Page", ComponentLink3URL=http://www.national.com/packaging/folders/mtc16.html, CompType="ADC IC", DatasheetVersion=Feb-2010, PackageDescription="Molded TSSOP, Jedec, 5 x 4.4 x 0.9mm Body, 16 Lead, 0.65mm Pitch", PackageReference=MTC16, PackageVersion="revD, Jun-2003", PinCount=16, RevisionNote="Component URLs added", RoHS=Y
U11: library part CMP-0309-00082-2, "2 / 3-Port Hub for USB with Optional Serial EEPROM Interface, 3.3V, 0 to 70 degC, 32-Pin LQFP (VF), Green (RoHS & no Sb/Br)", Manufacturer="Texas Instruments", Supply Voltage(s)(V)=3.3, ComponentLink1Description=Datasheet, ComponentLink1URL=http://www.ti.com/general/docs/lit/getliterature.tsp?genericPartNumber=TUSB2036&fileType=pdf, ComponentLink2Description="Package Specification", ComponentLink2URL=http://www.ti.com/litv/pdf/mtqf002b, DatasheetVersion=SLLS372E, Eco-Plan="Green (RoHS & no Sb/Br)", Integrated MCU Architecture=N/A, Mounting Technology="Surface Mount", PackageDescription="32-Pin Plastic Quad Flatpack, 7 x 7 mm Body, 0.8 mm Pitch", PackageReference=VF0032A, PackageVersion="revD, Apr-2000", PartNumber=TUSB2036VFR, SubFamily="USB Hub Controller", USB Full Speed=True, USB Speed=Full
U13: library part CMP-0309-00017-2, "ESD Protected,High-Speed USB 2.0 (480-Mbps) 1:2 Multiplexer / Demultiplexer Switch, 1:2 Mux / Demux, 6 ohm RON, 2.5 to 3.3V, -40 to 85 degC, 10-Pin UQFN (RSE), Green (RoHS & no Sb/Br)", Manufacturer="Texas Instruments", Architecture="\"1\",\"2 mux/demux\"", Bandwidth(MHz)=900, Code_JEDEC=MO-288-UEFD, ComponentLink1Description=Datasheet, ComponentLink1URL=http://www.ti.com/general/docs/lit/getliterature.tsp?genericPartNumber=TS3USB221A&fileType=pdf, ComponentLink2Description="Package Specification", ComponentLink2URL=http://www.ti.com/lit/ml/mpqf186c/mpqf186c.pdf, DatasheetVersion=SCDS277, Eco-Plan="Green (RoHS & no Sb/Br)", ESD HBM(kV)=+/-7, ICC(uA)=30, IL OFF(Max)(nA)=2, Mounting Technology="Surface Mount", Number of Channels=2, OFF Time(Max)(ns)=12, ON Time(Max)(ns)=30, PackageDescription="10-Leads Plastic Quad Flatpack No-Lead, 2 x 1.5 x 0.55 mm Body, 0.5 mm Pitch", PackageReference=RSE0010A, PackageVersion="revD, Jan-2011", PartNumber=TS3USB221ARSER, RON Flatness(Max)(Ohms)=1, RON Mis-match(Max)(Ohms)=0.2, ron(max)(ohms)=6, SubFamily="USB Switch", tpd max(ns)=0.25, Vcc range(V)="2.3 to 3.6"
U14: library part CMP-010-00031-2, "Gnss Lcc Rx Mod, Rom, Crystal"
U15: library part CMP-09116-000039-1, "IC OPAMP GP 1 CIRCUIT 6DFN", Case/Package=DFN, Input Bias Current=12nA, Input Offset Voltage (Vos)=1.2mV, Max Operating Temperature=85°C, Max Supply Voltage=18V, Min Operating Temperature=-40°C, Min Supply Voltage=1.8V, Operating Supply Current=20uA, Output Current per Channel=10mA, Package Quantity=1, Power Supply Rejection Ratio (PSRR)=86dB, Voltage Gain=120dB, Bandwidth=60kHz, Common Mode Rejection Ratio=68dB, Gain Bandwidth Product=60kHz, Lead Free="Lead Free", Mount="Surface Mount", Number of Amplifiers=1, Number of Circuits=1, Number of Elements=1, Number of Pins=6, Packaging="Tape and Reel", REACH SVHC="No SVHC", Slew Rate=0.018V/µs, Unity Gain Bandwidth Product=60kHz
Y1: library part CMP-2000-05733-3, "Crystal 25MHz ±20ppm (Tol) ±30ppm (Stability) 18pF FUND 60Ω 4-Pin SMD T/R", Case/Package=CSMD, ESR (Equivalent Series Resistance)=60R, Frequency=25MHz, Frequency Stability=30ppm, Frequency Tolerance=20ppm, Load Capacitance=18pF, Max Operating Temperature=85°C, Min Operating Temperature=-40°C, Operating Frequency="25 MHz", Package Quantity=1000, Depth=2.5mm, Height=0.039inch, Lead Free="Lead Free", Length=3.2mm, Mount="Surface Mount", Number of Pins=4, Packaging="Tape and Reel", Radiation Hardening=No, Series=ABM8G, Series Resistance=60R, Termination=SMD/SMT, Tolerance=20ppm, Width=0.098inch
Y2: library part CMP-27762-001115-1, "XTAL OSC XO 32.7680KHZ CMOS SMD", Case/Package=CSMD, Frequency=32.768kHz, Frequency Stability=25ppm, Load Capacitance=15pF, Max Operating Temperature=85°C, Max Supply Current=3.5mA, Min Operating Temperature=-40°C, Min Supply Voltage=2.97V, Operating Supply Voltage=3.3V, Depth=2mm, Height=0.037inch, Lead Free="Lead Free", Length=2.5mm, Mount="Surface Mount", Number of Pins=4, Packaging="Tape and Reel", Radiation Hardening=No, Series=ASDK, Termination=SMD/SMT, Width=0.079inch
Y3: library part CMP-27762-015134-1, "Crystal 16MHz ±30ppm (Tol) ±30ppm (Stability) 10pF FUND 80Ω 4-Pin SMD T/R", Case/Package=SMD/SMT, ESR (Equivalent Series Resistance)=80R, Frequency=16MHz, Frequency Stability=30ppm, Load Capacitance=10pF, Max Operating Temperature=60°C, Min Operating Temperature=-10°C, Depth=2.5mm, Frequency Tolerance=30ppm, Height=0.039inch, Lead Free="Lead Free", Length=3.2mm, Mount="Surface Mount", Number of Pins=4, Packaging="Tape and Reel", REACH SVHC="No SVHC", Series=ABM8G, Series Resistance=80R, Width=0.098inch
Y4: library part CMP-27762-012698-1, "CRYSTAL 6.0000MHZ 18PF SMD", Case/Package=SMD/SMT, ESR (Equivalent Series Resistance)=70R, Frequency=6MHz, Frequency Stability=50ppm, Frequency Tolerance=20ppm, Load Capacitance=18pF, Max Operating Temperature=70°C, Min Operating Temperature=-20°C, Operating Frequency="6 MHz", Package Quantity=1000, Resistor Type=Ceramic, Height=0.051inch, Lead Free="Lead Free", Length=0.276inch, Mount="Surface Mount", Number of Pins=4, Packaging="Tape and Reel", Series=ABMM, Series Resistance=70R, Termination=SMD/SMT, Tolerance=20ppm, Width=5mm

## Via types
v1: diameter 0.5, hole 0.2, Top Layer to Bottom Layer, 16 vias

## Nets (pads, with @x,y where several pads share a name; then routed paths per layer and width w, separated by ;. In a path a pad name is that pad's centre, name@x,y a point inside that pad or via, vN(x,y) a via of type N, cw(c..) or ccw(c..) an arc to the next point about the centre after c; other vN are vias at no path point)
3V3: C78.1 C79.1 C80.1 C81.1 C91.1 Q19.2 R76.2 R77.2 R95.1 R103.1 R104.1 U11.3 U11.6 U11.8 U11.25 U11.26 U15.6
3V3_MAIN: D6.2 D6.3 J9.83 J9.85
5V: C9.1@-124.478,-131 U8.3
5V_AUX: F9_DISP_0.1 F9_DISP_1.1 Q13_DISP_0.5 Q13_DISP_0.6 Q13_DISP_1.5 Q13_DISP_1.6 R74_DISP_0.2 R74_DISP_1.2
5V_MAIN: F1.2 F2.2 F4.2 J9.78 J9.80 J9.82 J9.84 J9.86 J9.88 R16.1 R17.1 R20.1 R46.2 U5.3 U5.4
5V_REG_EN: R41.1 R42.2 U4.7
5V_REG_FB: C41.2 C42.2 C43.2 C44.2 L13.2 U4.6 U5.1 U5.2
ACC_12V: R25.1
ACT_LED: J10.10 R56.2
ADC_MISO: J9.25 U9.15 U10.15
ADC_MOSI: J9.28 U9.14 U10.14
ADC_SCLK: J9.26 U9.16 U10.16
AMBIENT_TEMP: R68.2 R70.2 U10.11
AMP_I_SENSE: R89.1 U10.4
AMP_VCC: J1.3 U12.3 U12.4
ANT_DETECT: R106.2 U14.16
ANT_SENSE: R99.2 R101.1 U15.3
ANT_SHORT_N: C90.1 L14.1 R98.1 U14.17 U15.2
BAT_12V: J1.1 J1.2 J1.13 J1.14 Q1.5-6-7-8 Q3.5-6-7-8
CAM_GPIO0: J9.98 R2.1 U1.11
CAM_GPIO1: J9.99
CAN_INH: R30.1 U8.7
CAN_N: C12.1@-147,-130.478 D3.2 J1.29 L1.4 R35.2
CAN_P: C14.2@-205,-129.521 D3.1 J1.28 L1.1@-159.05,-130.25 R37.1
CFG0: R6.1 R8.2 U1.4
CH0_FAN_PWM: J3.2 Q6.3 R17.2
CH0_FAN_TACH: J3.4 J9.45
CH0_GPIO: J9.32 R18.1
CH1_FAN_PWM: J4.2 Q7.3 R20.2
CH1_FAN_TACH: J4.4 J9.47
CH1_GPIO: J9.27 R21.1
CKA_N: U1.40
CKA_P: U1.39
CKB_N: J8.88 U1.46
CKB_P: J8.90 U1.45
CKC_N: J8.28
CKC_P: J8.30
CONF_SCL: J9.79 U1.29
CONF_SDA: J9.81 U1.28
D0_N: C73.2 R78.1 U11.2
D0_P: C75.1 R81.1 U11.1
D1_N: R80.2 U11.11
D1_P: R75.2 U11.12
D2_N: R86.2 U11.15
D2_P: R83.2 U11.16
D3_N: R88.2 U11.19
D3_P: R87.2 U11.20
DA0_N: J8.16 U1.32
DA0_P: J8.18 U1.31
DA1_N: J8.22 U1.36
DA1_P: J8.24 U1.35
DA2_N: J8.34 U1.38
DA2_P: J8.36 U1.37
DA3_N: J8.40 U1.42
DA3_P: J8.42 U1.41
DB0_N: J8.76 U1.44
DB0_P: J8.78 U1.43
DB1_N: J8.82 U1.48
DB1_P: J8.84 U1.47
DB2_N: J8.94 U1.50
DB2_P: J8.96 U1.49
DB3_N: J8.93 U1.54
DB3_P: J8.95 U1.53
DBG_USB_N: J7.A7 J7.B7 U13.1
DBG_USB_P: J7.A6 J7.B6 U13.2
DES_1V2: C14.1@56.198,-285 C19.2 C20.2 C21.2 C22.2 C29.2 C30.2 R11.2 U1.30 U1.55 U1.56 U3.2 U3.4
DES_1V8: C12.1@45.198,-285 C23.2 C24.2 C25.2 C26.2 U1.7 U1.21 U2.2 U2.4
DIGI_USB_DISP_0_N: J14_DISP_0.3
DIGI_USB_DISP_0_P: J14_DISP_0.2
DIGI_USB_DISP_1_N: J14_DISP_1.3
DIGI_USB_DISP_1_P: J14_DISP_1.2
DISP_5V_DISP_0: J14_DISP_0.1 Q13_DISP_0.1 Q13_DISP_0.2
DISP_5V_DISP_1: J14_DISP_1.1 Q13_DISP_1.1 Q13_DISP_1.2
EEPROM_nWP: J9.19 P1.1
ETH_SYNC: J9.17 P1.13
FAN_PWM: J2.2 J9.20 R16.2
FAN_TACHO: J2.4 J9.15
FL_N: J1.8
FL_P: J1.7
FR_N: J1.6
FR_P: J1.5
GND: BT1.3 C8.2@-42.521,-131 C9.1@97.522,-286 C9.2@-123.521,-131 C10.1@103,-285.479 C10.2@-141,-129.521 C11.1@39.522,-286 C11.2@-134.521,-131 C12.2 C13.1@50,-285.479 C13.2@-171,-129.521 C14.1@-205,-130.478 C14.2@57.802,-285 C15.1 C16.1 C17.1 C18.1 C19.1 C20.1 C21.1 C22.1 C23.1 C24.1 C25.1 C26.1 C27.1 C28.1 C29.1 C30.1 C31.2 C32.2 C33.2 C34.2 C35.1 C36.2 C38.1 C39.1 C40.1 C41.1 C42.1 C43.1 C44.1 C45.2 C46.2 C47.2 C48.2 C49.2 C50.2 C51.2 C52.2 C53.2 C54.2 C55.2 C56.2 C57.2 C58.2 C59.2 C60.1 C61.1 C62.1 C63.1 C64.1 C65.1 C66.2 C67.2 C68.2 C69.2 C70.2 C71.2 C72.2 C73.1 C74.2 C75.2 C76.2 C77.2 C78.2 C79.2 C80.2 C81.2 C82.2 C83.2 C84.2 C85.2 C86.2 C87.2 C88.2 C89.2 C90.2 C91.2 D1.3 D1.8 D2.3 D2.8 D3.3 D4.3 D4.8 D5.3 D5.8 D7.2 D45.2 J1.4 J1.15 J1.16 J1.17 J1.18 J1.19 J1.20 J1.21 J1.22 J1.23 J1.24 J1.25 J1.26 J1.27 J1.30 J1.33 J2.3 J2.5 J2.6 J3.3 J4.3 J5.MH1 J5.MH2 J5.MH3 J5.MH4 J5.MH5 J6.P1 J6.S1 J6.S2 J7.A1_B12 J7.B1_A12 J7.SH1 J7.SH2 J7.SH3 J7.SH4 J8.2 J8.7 J8.8 J8.13 J8.14 J8.19 J8.20 J8.25 J8.26 J8.31 J8.32 J8.37 J8.38 J8.43 J8.49 J8.55 J8.56 J8.61 J8.62 J8.67 J8.68 J8.73 J8.74 J8.79 J8.80 J8.85 J8.86 J8.91 J8.92 J8.97 J8.98 J9.1 J9.2 J9.7 J9.8 J9.13 J9.14 J9.21 J9.24 J9.31 J9.34 J9.41 J9.44 J9.51 J9.54 J9.59 J9.60 J9.65 J9.66 J9.72 J9.73 J9.97 J10.1 J10.3 J10.9 J10.15 J10.21 J10.27 J10.33 J10.39 J10.45 J10.51 J10.57 J10.71 J10.73 J10.75 J10.76 J10.77 J11.4 J11.7 J11.10 J11.11 J12.4 J12.7 J12.10 J12.11 J13_DISP_0.2 J13_DISP_0.5 J13_DISP_0.8 J13_DISP_0.11 J13_DISP_0.17 J13_DISP_0.SH1 J13_DISP_0.SH2 J13_DISP_0.SH3 J13_DISP_0.SH4 J13_DISP_1.2 J13_DISP_1.5 J13_DISP_1.8 J13_DISP_1.11 J13_DISP_1.17 J13_DISP_1.SH1 J13_DISP_1.SH2 J13_DISP_1.SH3 J13_DISP_1.SH4 J14_DISP_0.4 J14_DISP_0.5 J14_DISP_0.6 J14_DISP_1.4 J14_DISP_1.5 J14_DISP_1.6 J15.2 J18.2 J18.3 MP1.1 P1.2 P1.4 P1.6 P1.8 P1.10 P1.12 P1.14 Q5.2 Q6.2 Q7.2 Q8.2 Q9.4 Q10.4 Q11.4 Q12.4 Q13_DISP_0.4 Q13_DISP_1.4 Q16.2 Q18.2 R1.1 R3.1 R4.1 R7.1 R8.1 R9.1 R10.1 R11.1 R19.2 R22.2 R27.1 R31.1 R32.1 R36.1 R42.1 R43.1 R47.1 R55.2 R59.1 R61.1 R70.1 R79.2 R82.2 R84.1 R85.1 R94.1 R101.2 R102.2 SD1.6 SD1.10 SD1.11 SD1.12 SD1.13 SW1.1 U1.57 U2.1 U3.1 U4.4 U4.8 U5.5 U6.9 U7.5 U8.2 U9.3 U9.12 U10.3 U10.12 U11.7 U11.24 U11.28 U12.5 U13.5 U13.6 U14.1 U14.10 U14.12 U15.5 U15.7 Y1.2 Y1.4 Y2.2 Y3.2 Y3.4 Y4.2 Y4.4
  other v1: 184.35,-283.65 185.45,-283.65 186.55,-283.65 187.65,-283.65 184.35,-282.55 185.45,-282.55 186.55,-282.55 187.65,-282.55 184.35,-281.45 185.45,-281.45 186.55,-281.45 187.65,-281.45 184.35,-280.35 185.45,-280.35 186.55,-280.35 187.65,-280.35
GPIO_VREF: C8.1@-43.478,-131 C10.1@-141,-130.478 C11.2@40.479,-286 C13.2@50,-284.521 C27.2 C28.2 C36.1 C55.1 C56.1 C60.2 C63.2 C86.1 F8.1 J9.77 Q11.5 Q11.6 Q12.5 Q12.6 R2.2 R5.2 R6.2 R23.2 R24.2 R26.2 R40.1 R45.2 R62.1 R65.1 R66.1 R67.1 R68.1 R72.2 R90.2 U1.24 U2.3 U3.3 U5.8 U6.18 U7.8 U8.5 U9.2 U10.2 U12.8
GPS_ENABLE: R105.2
GPS_nRESET: R95.2 U14.9
GPS_PWR: C88.1 C89.1 Q19.3 U14.7 U14.8
HDMI0_CEC: J8.52 J13_DISP_0.13
HDMI0_CK_N: J8.89 J13_DISP_0.12
HDMI0_CK_P: J8.87 J13_DISP_0.10
HDMI0_D0_N: J8.83 J13_DISP_0.9
HDMI0_D0_P: J8.81 J13_DISP_0.7
HDMI0_D1_N: J8.77 J13_DISP_0.6
HDMI0_D1_P: J8.75 J13_DISP_0.4
HDMI0_D2_N: J8.71 J13_DISP_0.3
HDMI0_D2_P: J8.69 J13_DISP_0.1
HDMI0_HOTP: J8.54 J13_DISP_0.19
HDMI0_SCL: J8.99 J13_DISP_0.15
HDMI0_SDA: J8.100 J13_DISP_0.16
HDMI1_CEC: J8.50 J13_DISP_1.13
HDMI1_CK_N: J8.65 J13_DISP_1.12
HDMI1_CK_P: J8.63 J13_DISP_1.10
HDMI1_D0_N: J8.59 J13_DISP_1.9
HDMI1_D0_P: J8.57 J13_DISP_1.7
HDMI1_D1_N: J8.53 J13_DISP_1.6
HDMI1_D1_P: J8.51 J13_DISP_1.4
HDMI1_D2_N: J8.47 J13_DISP_1.3
HDMI1_D2_P: J8.45 J13_DISP_1.1
HDMI1_HOTP: J8.44 J13_DISP_1.19
HDMI1_SCL: J8.48 J13_DISP_1.15
HDMI1_SDA: J8.46 J13_DISP_1.16
HDMI_5V_DISP_0: F9_DISP_0.2 J13_DISP_0.18
HDMI_5V_DISP_1: F9_DISP_1.2 J13_DISP_1.18
ID_SC: J9.36
ID_SD: J9.35
LNA_EN: R100.2 U14.13
M2_3V3: C45.1 C46.1 C47.1 C48.1 C49.1 C50.1 C51.1 C52.1 C53.1 D8.2 D8.3 F8.2 J10.2 J10.4 J10.12 J10.14 J10.16 J10.18 J10.70 J10.72 J10.74 R53.1 R54.1 R58.1
MFP6: R5.1 R7.2 U1.25
MIC_N: J1.32
MIC_P: J1.31
nBT_INH: J9.92 P1.5
nEN_P0: U11.9
nEN_P1: U11.13
nEN_P2: U11.17
nERRB: U1.14
NetC3_2: C3.2 R3.2
NetC4_2: C4.2 R4.2
NetC7_2: C7.2 R9.2
NetC8_2: C8.2@113.479,-286 R10.2
NetC11_1: C11.1@-135.478,-131 D2.1@-113,-129.825 R33.2 U8.10
NetC13_1: C13.1@-171,-130.478 Q8.3 R33.1 R34.2 SW1.2
NetC15_2: C15.2 C16.2 U1.8
NetC17_2: C17.2@9,-284.521 C18.2 U1.20
NetC31_1: C31.1 L1.2@-68,-285.5 L2.1 R12.2
NetC32_1: C32.1 L4.2 L5.1 R13.2
NetC33_1: C33.1 L7.2 L8.1 R14.2
NetC34_1: C34.1 L10.2 L11.1 R15.2
NetC35_2: C35.2 J6.P6
NetC37_1: C37.1 U4.3
NetC37_2: C37.2 D7.1 L13.1 U4.1
NetC38_2: C38.2 C39.2 C40.2 F3.2 U4.2
NetC54_1: C54.1 R58.2 R60.1 Y2.4
NetC57_1: C57.1 R62.2 R64.2
NetC61_2: C61.2 C62.2 R66.2 U9.13
NetC64_2: C64.2 C65.2 R67.2 U10.13
NetC66_1: C66.1 C67.1 Q10.1 Q10.2 SD1.4
NetC72_1: C72.1 R75.1
NetC74_1: C74.1 R80.1
NetC76_1: C76.1 R83.1
NetC77_1: C77.1 R86.1
NetC82_1: C82.1 R87.1
NetC85_1: C85.1 R88.1
NetC87_1: C87.1 U13.10
NetD6_1: D6.1 R38.1
NetD6_4: D6.4 R39.1
NetD8_1: D8.1 R55.1
NetD8_4: D8.4 R56.1
NetD45_1: D45.1 R29.1 R31.2 U9.4
NetF1_1: F1.1 J2.1
NetF2_1: F2.1 J3.1
NetF4_1: F4.1 J4.1
NetF5_2: F5.2
NetF7_2: F7.2 Q14.1 Q14.2 Q14.3 Q15.1 Q15.2 Q15.3 R91.2
NetF10_2: F10.2 L1.1@-68,-276.5
NetF11_2: F11.2 L4.1
NetF12_2: F12.2 L7.1
NetF13_2: F13.2 L10.1
nETH_G_LED: J6.L1 J9.18
nETH_Y_LED: J6.L3 J9.16
NetJ6_L2: J6.L2 R24.1
NetJ6_L4: J6.L4 R23.1
NetJ10_68: J10.68 R52.2
NetJ15_1: J15.1 U13.9
NetJ18_1: J18.1 L14.2 R96.1
NetL2_2: L2.2 L3.1 R12.1
NetL5_2: L5.2 L6.1 R13.1
NetL8_2: L8.2 L9.1 R14.1
NetL11_2: L11.2 L12.1 R15.1
NetQ5_1: Q5.1 R30.2 R32.2
NetQ5_3: Q5.3 R28.1 R69.1
NetQ6_1: Q6.1 R18.2 R19.1
NetQ7_1: Q7.1 R21.2 R22.1
NetQ8_1: Q8.1 R25.2 R36.2
NetQ9_1: Q9.1 Q9.2
NetQ13_DISP_0_3: Q13_DISP_0.3 R74_DISP_0.1
NetQ13_DISP_1_3: Q13_DISP_1.3 R74_DISP_1.1
NetQ14_5-6-7-8: Q14.5-6-7-8 Q15.5-6-7-8 U12.1 U12.2
NetQ16_1: Q16.1 R93.2 R94.2
NetQ16_3: Q16.3 R91.1 R92.1
NetQ17_1: Q17.1 Q18.3 R97.2
NetQ17_3: Q17.3 R98.2 R99.1
NetQ18_1: Q18.1 R100.1 R102.1
NetQ19_1: Q19.1 R104.2 R105.1
NetR1_2: R1.2 U1.17
NetR26_1: R26.1 U7.6
NetR34_1: R34.1 U8.9
NetR40_2: R40.2 R43.2 U9.8
NetR41_2: R41.2
NetR44_1: R44.1 U9.7
NetR44_2: R44.2 U5.7
NetR45_1: R45.1 U5.6
NetR46_1: R46.1 R47.2 U9.6
NetR57_2: R57.2 R59.2 Y2.3
NetR60_2: R60.2 R61.2 Y2.1
NetR63_1: R63.1 U9.5
NetR63_2: R63.2 U7.7
NetR64_1: R64.1 U6.17
NetR65_2: R65.2 U6.12
NetR78_2: R78.2 U13.3
NetR81_2: R81.2 U13.4
NetR84_2: R84.2 U11.31
NetR85_2: R85.2 U11.21
NetR89_2: R89.2 U12.7
NetR90_1: R90.1 U12.6
NetR93_1: R93.1
NetR103_2: R103.2 TP4.1 U14.18
NetR106_1: R106.1 U15.4
NetSD1_9: SD1.9
NetU6_1: U6.1 U8.1
NetU6_2: U6.2 U8.4
NetU9_9: U9.9
NetU9_10: U9.10
NetU9_11: U9.11
NetU10_5: U10.5
NetU10_6: U10.6
NetU10_7: U10.7
NetU10_8: U10.8
NetU10_9: U10.9
NetU10_10: U10.10
nLED_ACT: J9.22 R39.2
nLED_PWR: J9.96 R38.2
nLOCK: U1.13
nOC_P0: U11.10
nOC_P1: U11.14
nOC_P2: U11.18
NP0: R76.1 R79.1 U11.22
NP1: R77.1 R82.1 U11.23
nPCIE_CLKREQ: J10.52
nPCIE_RST: J10.50
nPCIE_WAKE: J10.54 R50.1
nPWR_BTN: J9.91 P1.7
nRPI_BOOT: J9.94 P1.9
nTUSB2036_RST: U11.4
nWIFI_INH: J9.90 P1.3
PCIE0_CLK_N: J8.11
PCIE0_CLK_P: J8.9
PCIE0_TX0_N: J8.23
PCIE0_TX0_P: J8.21
PCIE_CLKREQ: R49.1
PCIE_nCLKREQ: J8.1 R49.2
PCIE_nRST: J8.10 R48.2
PCIE_nWAKE: J8.3 R50.2
PCIE_PWR_EN: J8.5 Q9.3 R51.1
PCIE_RST: R48.1 R54.2
PCIE_RX0_N: J8.17 J10.43
PCIE_RX0_P: J8.15 J10.41
PMIC_EN: J9.100 P1.11
PoC_A: C1.2 D1.1@31.583,-284 D1.10 J5.4 L3.2
PoC_B: C2.2 D1.5 D1.6 J5.3 L6.2
PoC_C: C5.2 D2.1@35.583,-284 D2.10 J5.2 L12.2
PoC_D: C6.2 D2.5 D2.6 J5.1 L9.2
PoC_PWR: F6.2 F10.1 F11.1 F12.1 F13.1
PRE_CAN_N: L1.3 U8.12
PRE_CAN_P: L1.2@-154.95,-130.25 U8.13
PRE_CLK_N: J10.53
PRE_CLK_P: J10.55
PRE_SHUNT: Q2.5-6-7-8 Q4.5-6-7-8 U7.3 U7.4
PRE_TX0_N: J10.49
PRE_TX0_P: J10.47
PRE_VCC: D1.1@-59.635,-131 D2.2@-113,-126.175 Q1.1 Q1.2 Q1.3 Q2.1 Q2.2 Q2.3 Q3.1 Q3.2 Q3.3 Q4.1 Q4.2 Q4.3 R28.2
PWR_MOSFET: Q14.4 Q15.4 R92.2